# EAGLE board hersteld (EAGLE 6.5.0), part 1 of 2
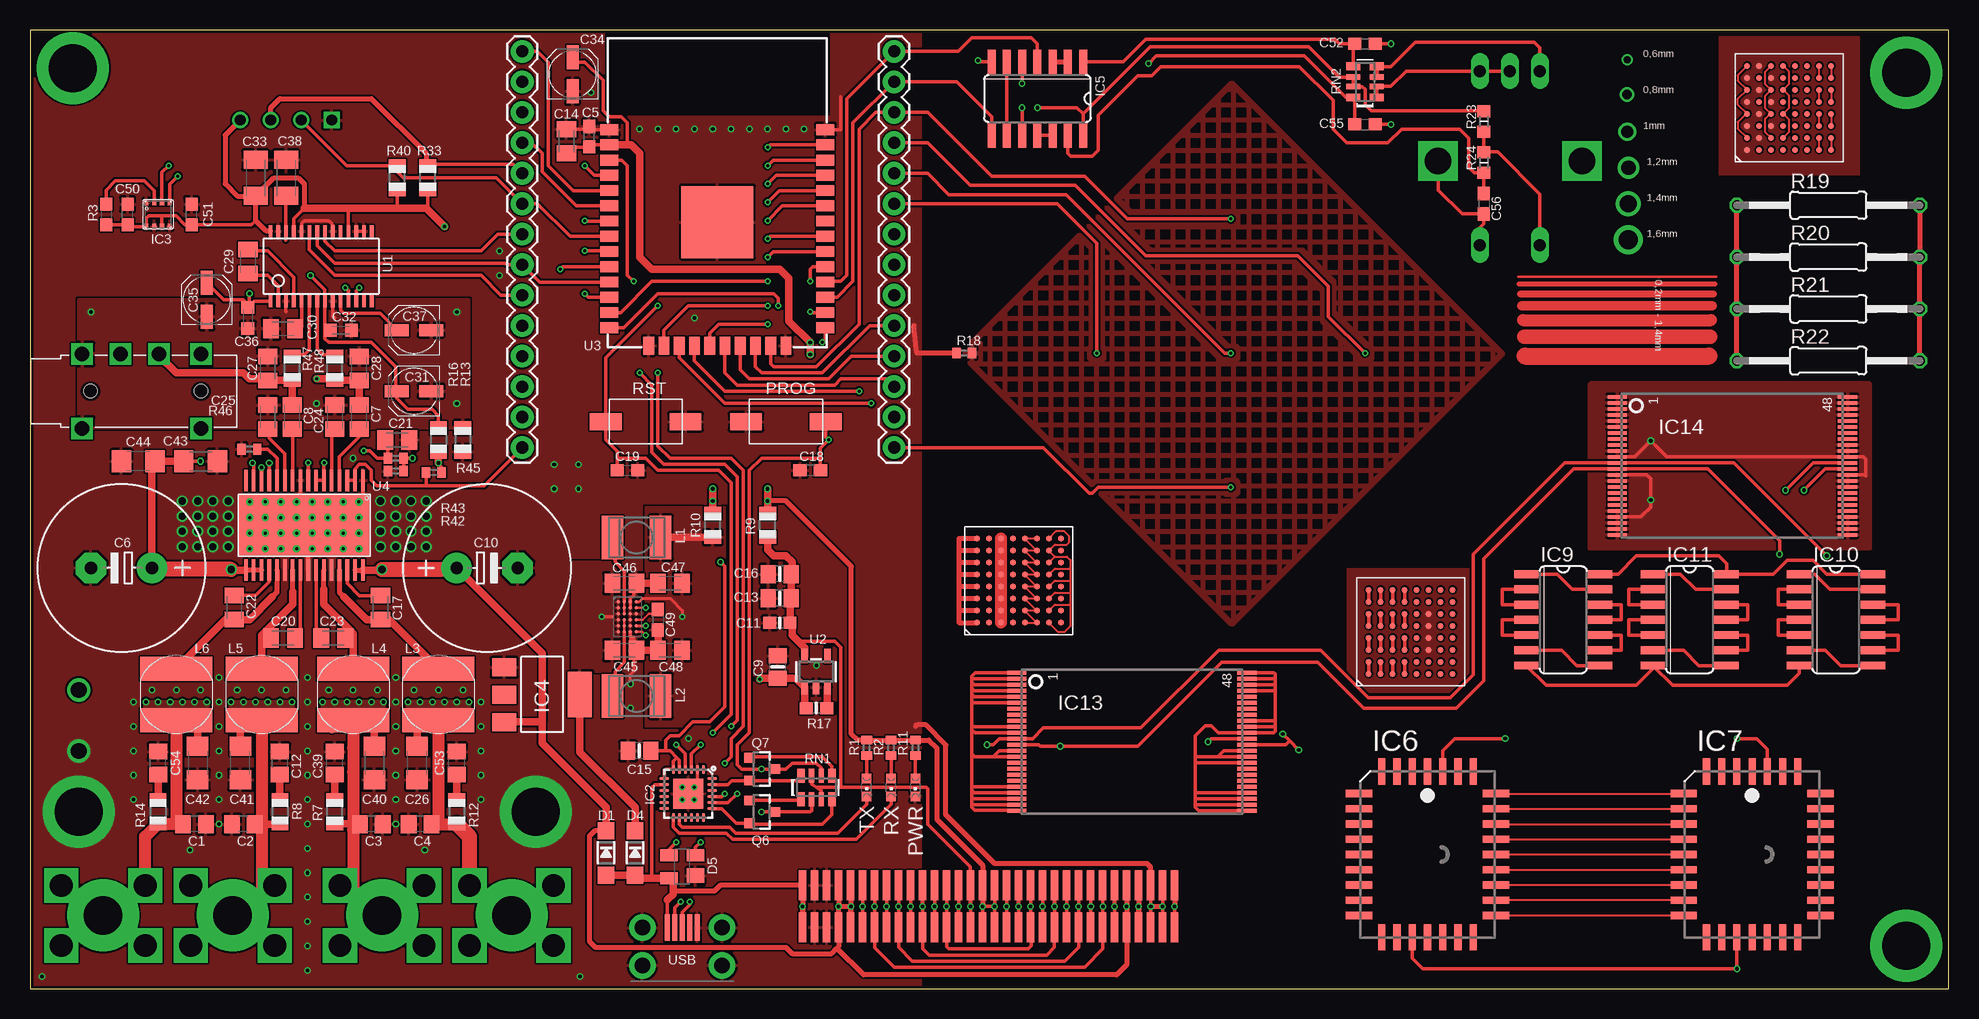
[diagram p0: board, top side]
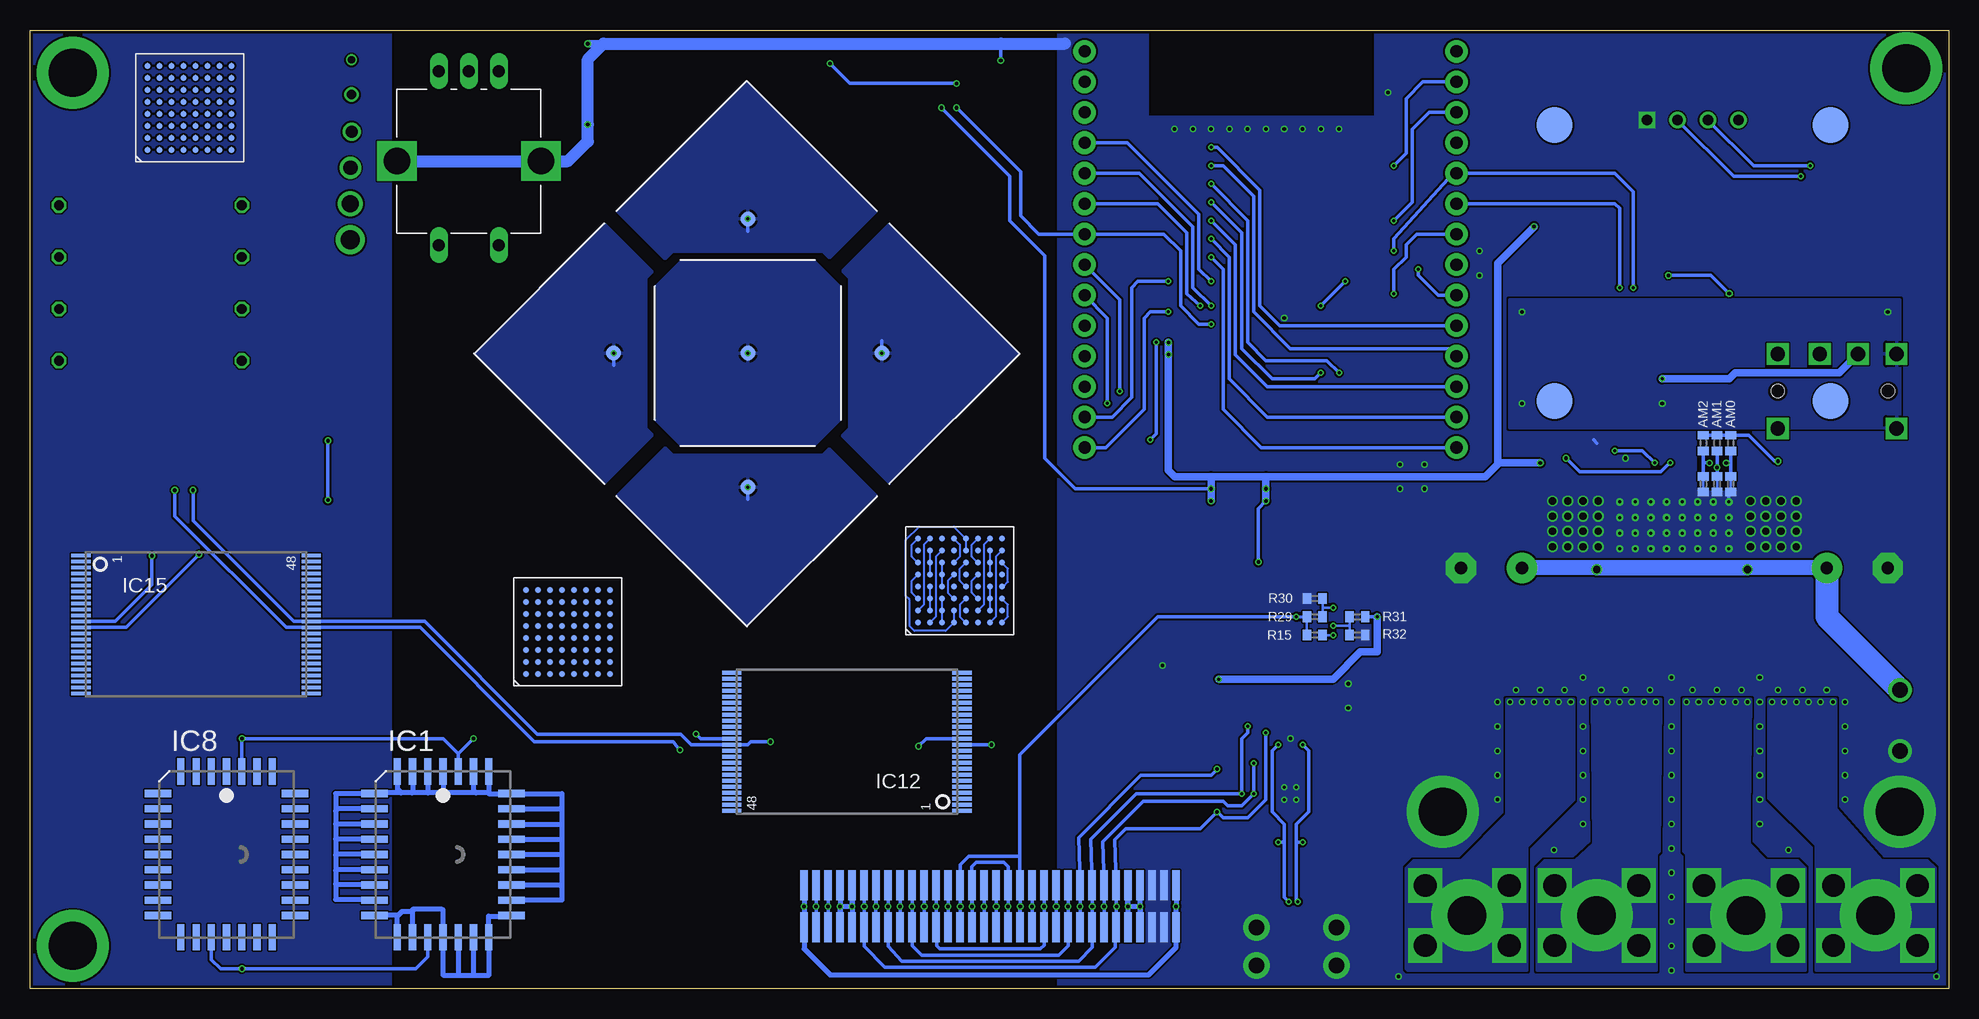
[diagram p1: board, bottom side, seen from below]

Size 159.89 x 79.88 mm. Coordinates in mm from the lower left corner, seen from the top.
Outline: 159.89,0 159.89,79.88 0,79.88 0,0 159.89,0
Copper layers (1*16): Top 0.018mm / dielectric 1.55mm / Bottom 0.018mm
Design rules "eC_2Layer_PClass6_BaseCopperO18_eCDefault *": minimum track width 0.15mm, minimum drill 0.25mm, track to track 0.15mm, track to pad 0.15mm, pad to pad 0.15mm, via to via 0.15mm, smd to smd 0mil, copper to edge 0.25mm, drill to drill 0.35mm, minimum pad ring 0.175mm, minimum via ring 0.125mm, stop-mask expansion 0mil, vias tented up to drill 0.45mm, thermal gap 0.2mm
Net classes: 0 default: width 0.152 mm, drill 0.25 mm, clearance 0.152 mm; 1 gnd: width 0.254 mm, drill 0.3 mm, clearance 0.152 mm; 2 vcc: width 0.254 mm, drill 0.3 mm, clearance 0.152 mm

## Footprints (pad centres in the part's own frame; a part is rotated, then mirrored left to right if it is on the bottom)
R0402 = smd 0.7 x 0.9: 1 -0.65,0; 2 0.65,0
C0805 = smd 1.3 x 1.5: 1 -0.95,0; 2 0.95,0
C0603 = smd 1.1 x 1: 1 -0.85,0; 2 0.85,0
E5-13 = drill 1.016 pad 2.54: + -2.54,0 | drill 1.016 pad 2.54 octagon: - 2.54,0
C0805K = smd 1.3 x 1.6: 1 -1,0; 2 1,0
0805-NO = smd 1.24 x 1.5: 1 -0.95,0; 2 0.95,0
0603-NO = smd 1.075 x 1: 1 -0.85,0; 2 0.85,0
C1206 = smd 1.6 x 1.8: 1 -1.4,0; 2 1.4,0
UD-4X5,8_NICHICON = smd 2 x 1: + 1.425,0; - -1.425,0
C0603K = smd 1.05 x 1.08: 1 -0.875,0; 2 0.875,0
C1206K = smd 1.5 x 2: 1 -1.5,0; 2 1.5,0
0603 = smd 1.1 x 1: 1 -0.85,0; 2 0.85,0
SOD-123 = smd 1.4 x 1.4: A 1.85,0; C -1.85,0
SOT143 = smd 1.2 x 1.44: 1 -0.75,-1.1 | smd 1 x 1.44: 2 0.95,-1.1; 3 0.95,1.1; 4 -0.95,1.1
PLCC32R = smd 0.6 x 2.2: 1 0,6.9; 2 -1.27,6.9; 3 -2.54,6.9; 4 -3.81,6.9; 14 -3.81,-6.9; 15 -2.54,-6.9; 16 -1.27,-6.9; 17 0,-6.9; 18 1.27,-6.9; 19 2.54,-6.9; 20 3.81,-6.9; 30 3.81,6.9; 31 2.54,6.9; 32 1.27,6.9 | smd 2.2 x 0.6: 5 -5.7,5.08; 6 -5.7,3.81; 7 -5.7,2.54; 8 -5.7,1.27; 9 -5.7,0; 10 -5.7,-1.27; 11 -5.7,-2.54; 12 -5.7,-3.81; 13 -5.7,-5.08; 21 5.7,-5.08; 22 5.7,-3.81; 23 5.7,-2.54; 24 5.7,-1.27; 25 5.7,0; 26 5.7,1.27; 27 5.7,2.54; 28 5.7,3.81; 29 5.7,5.08
QFN24_4MM_SMSC = smd 0.8 x 0.28: 1 -2,1.25; 2 -2,0.75; 3 -2,0.25; 4 -2,-0.25; 5 -2,-0.75; 6 -2,-1.25; 13 2,-1.25; 14 2,-0.75; 15 2,-0.25; 16 2,0.25; 17 2,0.75; 18 2,1.25 | smd 0.28 x 0.8: 7 -1.25,-2; 8 -0.75,-2; 9 -0.25,-2; 10 0.25,-2; 11 0.75,-2; 12 1.25,-2; 19 1.25,2; 20 0.75,2; 21 0.25,2; 22 -0.25,2; 23 -0.75,2; 24 -1.25,2 | smd 2.5 x 2.5: THERM 0,0
BME280 = smd 0.35 x 0.5: 1 0.975,-1.025; 2 0.325,-1.025; 3 -0.325,-1.025; 4 -0.975,-1.025; 5 -0.975,1.025; 6 -0.325,1.025; 7 0.325,1.025; 8 0.975,1.025
SOT223 = smd 1.499 x 2.007: 1 -2.261,-3.15; 2 0.025,-3.15; 3 2.311,-3.15 | smd 3.81 x 2.007: 4 0,3.15
SO14 = smd 0.66 x 2.032: 1 -3.81,-3.073; 2 -2.54,-3.073; 3 -1.27,-3.073; 4 0,-3.073; 5 1.27,-3.073; 6 2.54,-3.073; 7 3.81,-3.073; 8 3.81,3.073; 9 2.54,3.073; 10 1.27,3.073; 11 0,3.073; 12 -1.27,3.073; 13 -2.54,3.073; 14 -3.81,3.073
TSOP48 = smd 1.6 x 0.3: 1 -9.6,5.75; 2 -9.6,5.25; 3 -9.6,4.75; 4 -9.6,4.25; 5 -9.6,3.75; 6 -9.6,3.25; 7 -9.6,2.75; 8 -9.6,2.25; 9 -9.6,1.75; 10 -9.6,1.25; 11 -9.6,0.75; 12 -9.6,0.25; 13 -9.6,-0.25; 14 -9.6,-0.75; 15 -9.6,-1.25; 16 -9.6,-1.75; 17 -9.6,-2.25; 18 -9.6,-2.75; 19 -9.6,-3.25; 20 -9.6,-3.75; 21 -9.6,-4.25; 22 -9.6,-4.75; 23 -9.6,-5.25; 24 -9.6,-5.75; 25 9.6,-5.75; 26 9.6,-5.25; 27 9.6,-4.75; 28 9.6,-4.25; 29 9.6,-3.75; 30 9.6,-3.25; 31 9.6,-2.75; 32 9.6,-2.25; 33 9.6,-1.75; 34 9.6,-1.25; 35 9.6,-0.75; 36 9.6,-0.25; 37 9.6,0.25; 38 9.6,0.75; 39 9.6,1.25; 40 9.6,1.75; 41 9.6,2.25; 42 9.6,2.75; 43 9.6,3.25; 44 9.6,3.75; 45 9.6,4.25; 46 9.6,4.75; 47 9.6,5.25; 48 9.6,5.75
1X14 = drill 1.016 pad 1.88: 1 0,0; 2 2.54,0; 3 5.08,0; 4 7.62,0; 5 10.16,0; 6 12.7,0; 7 15.24,0; 8 17.78,0; 9 20.32,0; 10 22.86,0; 11 25.4,0; 12 27.94,0; 13 30.48,0; 14 33.02,0
L4532P = smd 1.8 x 3.6: 1 -2,0; 2 2,0
SRN6045 = smd 2 x 6: 1 -2.15,0; 2 2.15,0
CHIPLED_0603 = smd 0.8 x 0.8: A 0,-0.75; C 0,0.75
SOT23-3 = smd 0.8 x 0.9: 1 -0.95,-1; 2 0.95,-1; 3 0,1.1
R0805 = smd 1.1 x 1.4: 1 -1,0; 2 1,0
0207/15 = drill 0.813 octagon: 1 -7.62,0; 2 7.62,0
R0603 = smd 1 x 1.1: 1 -0.85,0; 2 0.85,0
RN8P-4R-CRA06S = smd 0.63 x 1.15: 1 -1.295,-0.975; 4 1.295,-0.975; 5 1.295,0.975; 8 -1.295,0.975 | smd 0.44 x 1.15: 2 -0.4,-0.975; 3 0.4,-0.975; 6 0.4,0.975; 7 -0.4,0.975
SW2-4.0-6.0X3.0X2.5MM = smd 2.65 x 1.4: 1 -3.325,0; 2 3.325,0
B1,27 = smd 1.27 x 1.27: TP 0,0
TSSOP-28 = smd 0.305 x 0.991: 1 -4.225,-2.918; 2 -3.575,-2.918; 3 -2.925,-2.918; 4 -2.275,-2.918; 5 -1.625,-2.918; 6 -0.975,-2.918; 7 -0.325,-2.918; 8 0.325,-2.918; 9 0.975,-2.918; 10 1.625,-2.918; 11 2.275,-2.918; 12 2.925,-2.918; 13 3.575,-2.918; 14 4.225,-2.918; 15 4.225,2.918; 16 3.575,2.918; 17 2.925,2.918; 18 2.275,2.918; 19 1.625,2.918; 20 0.975,2.918; 21 0.325,2.918; 22 -0.325,2.918; 23 -0.975,2.918; 24 -1.625,2.918; 25 -2.275,2.918; 26 -2.925,2.918; 27 -3.575,2.918; 28 -4.225,2.918
SOT23-5 = smd 0.55 x 1.2: 1 -0.95,-1.3; 2 0,-1.3; 3 0.95,-1.3; 4 0.95,1.3; 5 -0.95,1.3
ESP-WROOM-32 = smd 0.9 x 1.5: 1 7.7,9; 2 6.43,9; 3 5.16,9; 4 3.89,9; 5 2.62,9; 6 1.35,9; 7 0.08,9; 8 -1.19,9; 9 -2.46,9; 10 -3.73,9; 11 -5,9; 12 -6.27,9; 13 -7.54,9; 14 -8.81,9; 25 -8.81,-9; 26 -7.54,-9; 27 -6.27,-9; 28 -5,-9; 29 -3.73,-9; 30 -2.46,-9; 31 -1.19,-9; 32 0.08,-9; 33 1.35,-9; 34 2.62,-9; 35 3.89,-9; 36 5.16,-9; 37 6.43,-9; 38 7.7,-9 | smd 1.5 x 0.9: 15 -10.3,5.715; 16 -10.3,4.445; 17 -10.3,3.175; 18 -10.3,1.905; 19 -10.3,0.635; 20 -10.3,-0.635; 21 -10.3,-1.905; 22 -10.3,-3.175; 23 -10.3,-4.445; 24 -10.3,-5.715 | smd 6 x 6: GND 0,0
TSSOP32-GROUNDPAD = smd 1.8 x 0.3: AM0 -3.737,-4.225; AM1 -3.737,-3.575; AM2 -3.737,-2.925; AVCC 3.737,-4.875; BSNL 3.737,-2.925; BSNR 3.737,0.975; BSPL 3.737,-0.325; BSPR 3.737,3.575; FAULTZ -3.737,3.575; GAIN/SLV -3.737,0.325; GND1 -3.737,-0.325; GND2 3.737,-1.625; GND3 3.737,0.325; GND4 3.737,2.275; GVDD -3.737,0.975; INNL -3.737,-1.625; INNR -3.737,2.275; INPL -3.737,-0.975; INPR -3.737,2.925; MODSEL -3.737,4.875; MUTE -3.737,-2.275; OUTNL 3.737,-2.275; OUTNR 3.737,1.625; OUTPL 3.737,-0.975; OUTPR 3.737,2.925; PLIMIT -3.737,1.625; PVCC1 3.737,-4.225; PVCC2 3.737,-3.575; PVCC3 3.737,4.225; PVCC4 3.737,4.875; SDZ -3.737,4.225; SYNC -3.737,-4.875 | drill 0.25: P$33 0.65,4.55; P$34 -0.65,4.55; P$35 -1.95,4.55; P$36 1.95,4.55; P$37 -1.95,3.25; P$38 -1.95,1.95; P$39 -1.95,0.65; P$40 -1.95,-0.65; P$41 -1.95,-1.95; P$42 -1.95,-3.25; P$43 -1.95,-4.55; P$44 -0.65,3.25; P$45 0.65,3.25; P$46 1.95,3.25; P$47 -0.65,1.95; P$48 0.65,1.95; P$49 1.95,1.95; P$50 1.95,0.65; P$51 0.65,0.65; P$52 -0.65,0.65; P$53 -0.65,-0.65; P$54 0.65,-0.65; P$55 1.95,-0.65; P$56 1.95,-1.95; P$57 1.95,-3.25; P$58 1.95,-4.55; P$59 0.65,-4.55; P$60 0.65,-3.25; P$61 0.65,-1.95; P$62 -0.65,-1.95; P$63 -0.65,-3.25; P$64 -0.65,-4.55 | smd 5 x 11: POWERPAD 0,0.005
0714360864 = smd 0.635 x 2.5: P$1 -15.5,-1.75; P$2 -14.5,-1.75; P$3 -13.5,-1.75; P$4 -12.5,-1.75; P$5 -11.5,-1.75; P$6 -10.5,-1.75; P$7 -9.5,-1.75; P$8 -8.5,-1.75; P$9 -7.5,-1.75; P$10 -6.5,-1.75; P$11 -5.5,-1.75; P$12 -4.5,-1.75; P$13 -3.5,-1.75; P$14 -2.5,-1.75; P$15 -1.5,-1.75; P$16 -0.5,-1.75; P$17 0.5,-1.75; P$18 1.5,-1.75; P$19 2.5,-1.75; P$20 3.5,-1.75; P$21 4.5,-1.75; P$22 5.5,-1.75; P$23 6.5,-1.75; P$24 7.5,-1.75; P$25 8.5,-1.75; P$26 9.5,-1.75; P$27 10.5,-1.75; P$28 11.5,-1.75; P$29 12.5,-1.75; P$30 13.5,-1.75; P$31 14.5,-1.75; P$32 15.5,-1.75; P$33 15.5,1.75; P$34 14.5,1.75; P$35 13.5,1.75; P$36 12.5,1.75; P$37 11.5,1.75; P$38 10.5,1.75; P$39 9.5,1.75; P$40 8.5,1.75; P$41 7.5,1.75; P$42 6.5,1.75; P$43 5.5,1.75; P$44 4.5,1.75; P$45 3.5,1.75; P$46 2.5,1.75; P$47 1.5,1.75; P$48 0.5,1.75; P$49 -0.5,1.75; P$50 -1.5,1.75; P$51 -2.5,1.75; P$52 -3.5,1.75; P$53 -4.5,1.75; P$54 -5.5,1.75; P$55 -6.5,1.75; P$56 -7.5,1.75; P$57 -8.5,1.75; P$58 -9.5,1.75; P$59 -10.5,1.75; P$60 -11.5,1.75; P$61 -12.5,1.75; P$62 -13.5,1.75; P$63 -14.5,1.75; P$64 -15.5,1.75
DISPLAY = drill 0.9 square: P$1 -3.81,11.93 | drill 0.9: P$2 -1.27,11.93; P$3 1.27,11.93; P$4 3.81,11.93 | smd 3 x 3: P$5 -11.5,11.5; P$6 11.5,11.5; P$7 -11.5,-11.5; P$8 11.5,-11.5
BGA64 = smd 0.5 x 0.5: P$1 -3.5,3.5; P$2 -3.5,2.5; P$3 -3.5,1.5; P$4 -3.5,0.5; P$5 -3.5,-0.5; P$6 -3.5,-1.5; P$7 -3.5,-2.5; P$8 -3.5,-3.5; P$9 -2.5,3.5; P$10 -2.5,2.5; P$11 -2.5,1.5; P$12 -2.5,0.5; P$13 -2.5,-0.5; P$14 -2.5,-1.5; P$15 -2.5,-2.5; P$16 -2.5,-3.5; P$17 -1.5,3.5; P$18 -1.5,2.5; P$19 -1.5,1.5; P$20 -1.5,0.5; P$21 -1.5,-0.5; P$22 -1.5,-1.5; P$23 -1.5,-2.5; P$24 -1.5,-3.5; P$25 -0.5,3.5; P$26 -0.5,2.5; P$27 -0.5,1.5; P$28 -0.5,0.5; P$29 -0.5,-0.5; P$30 -0.5,-1.5; P$31 -0.5,-2.5; P$32 -0.5,-3.5; P$33 0.5,3.5; P$34 0.5,2.5; P$35 0.5,1.5; P$36 0.5,0.5; P$37 0.5,-0.5; P$38 0.5,-1.5; P$39 0.5,-2.5; P$40 0.5,-3.5; P$41 1.5,3.5; P$42 1.5,2.5; P$43 1.5,1.5; P$44 1.5,0.5; P$45 1.5,-0.5; P$46 1.5,-1.5; P$47 1.5,-2.5; P$48 1.5,-3.5; P$49 2.5,3.5; P$50 2.5,2.5; P$51 2.5,1.5; P$52 2.5,0.5; P$53 2.5,-0.5; P$54 2.5,-1.5; P$55 2.5,-2.5; P$56 2.5,-3.5; P$57 3.5,3.5; P$58 3.5,2.5; P$59 3.5,1.5; P$60 3.5,0.5; P$61 3.5,-0.5; P$62 3.5,-1.5; P$63 3.5,-2.5; P$64 3.5,-3.5
SCREWCON = drill 1.9 square: P$1 -2.5,3.5; P$2 2.5,3.5; P$3 -2.5,-3.5; P$4 2.5,-3.5
DSBGA24 = smd 0.3 x 0.3: A1 1.249,0.751; A2 1.249,0.251; A3 1.249,-0.249; A4 1.249,-0.749; B1 0.749,0.751; B2 0.749,0.251; B3 0.749,-0.249; B4 0.749,-0.749; C1 0.249,0.751; C2 0.249,0.251; C3 0.249,-0.249; C4 0.249,-0.749; D1 -0.251,0.751; D2 -0.251,0.251; D3 -0.251,-0.249; D4 -0.251,-0.749; E1 -0.751,0.751; E2 -0.751,0.251; E3 -0.751,-0.249; E4 -0.751,-0.749; F1 -1.251,0.751; F2 -1.251,0.251; F3 -1.251,-0.249; F4 -1.251,-0.749
JACK = drill 1.2 square: P$1 -4.8,3.1; P$2 -1.6,3.1; P$3 1.6,3.1; P$4 5.1,3.1; P$5 5.1,-3.1; P$6 -4.8,-3.1 | hole 1.1: 5.1,0; -4.1,0
ENCODER = drill 1 long: A 2.5,-7.5; B1 0,-7.5; B2 -2.5,-7.5; COM -2.5,7; SW 2.5,7 | drill 2.2 square: P$6 -6,0; P$7 6,0
MICRO-B-SMT = smd 0.4 x 2.2: 1 1.24,0; 2 0.62,0; 3 0,0; 4 -0.62,0; 5 -1.24,0 | drill 1.3 pad 2.2: P$6 -3.325,3.15; P$7 -3.325,0; P$8 3.325,3.15; P$9 3.325,0

## Placement (x,y rotation side)
AM0  0  [R0402]  18.16,42.04 90 bottom
AM1  0  [R0402]  19.3,42.04 90 bottom
AM2  0  [R0402]  20.45,42.04 90 bottom
C1  1n  [C0805]  13.72,13.72 180 top
C2  1n  [C0805]  17.78,13.72 180 top
C3  1n  [C0805]  28.45,13.72 180 top
C4  1n  [C0805]  32.51,13.72 180 top
C5  100n  [C0603]  46.61,70.99 90 top
C6  [E5-13]  7.62,35.05 180 top
C7  1u  [C0805K]  27.43,47.62 270 top
C8  1u  [C0805K]  21.84,47.62 270 top
C9  10µF  [0805-NO]  62.32,26.8 90 top
C10  [E5-13]  38.1,35.05 0 top
C11  1uF  [0603-NO]  62.48,30.47 180 top
C12  10n  [C0805]  20.83,18.8 90 top
C13  10µF  [0805-NO]  62.47,32.52 180 top
C14  10u  [C0805K]  44.7,70.61 90 top
C15  10uF  [0805-NO]  50.79,19.81 180 top
C16  10uF  [0805-NO]  62.48,34.54 180 top
C17  220n  [C0805K]  29.21,31.75 270 top
C18  1n  [C0603]  65.02,43.18 180 top
C19  1n  [C0603]  49.78,43.18 0 top
C20  220n  [C0805K]  21.08,29.21 180 top
C21  1u  [C0805K]  30.61,45.72 0 top
C22  220n  [C0805K]  17.02,31.75 270 top
C23  220n  [C0805K]  25.27,29.21 0 top
C24  1u  [C0805K]  25.4,47.62 270 top
C25  1u  [C0805K]  19.81,47.62 270 top
C26  1u  [C1206]  32.26,18.8 90 top
C27  2n2  [C0805K]  19.81,51.69 90 top
C28  2n2  [C0805K]  27.43,51.69 90 top
C29  2u2  [C0805K]  18.16,60.58 90 top
C30  2u2  [C0805K]  21.08,54.99 180 top
C31  10u  [UD-4X5,8_NICHICON]  32,49.78 180 top
C32  100n  [C0603K]  25.91,54.86 180 top
C33  2u2  [C1206K]  18.8,67.56 270 top
C34  10u  [UD-4X5,8_NICHICON]  45.21,76.2 90 top
C35  10u  [UD-4X5,8_NICHICON]  14.73,57.4 90 top
C36  100n  [C0603K]  18.16,55.88 90 top
C37  10u  [UD-4X5,8_NICHICON]  32,54.86 180 top
C38  2u2  [C1206K]  21.34,67.56 90 top
C39  10n  [C0805]  25.4,18.8 90 top
C40  1u  [C1206]  28.7,18.8 270 top
C41  1u  [C1206]  17.53,18.8 90 top
C42  1u  [C1206]  13.97,18.8 270 top
C43  1u  [C1206]  14.22,43.94 0 top
C44  1u  [C1206]  9.02,43.94 180 top
C45  22u  [C0805K]  49.53,28.19 0 top
C46  22u  [C0805K]  49.53,33.78 0 top
C47  47u  [C0805K]  53.34,33.78 180 top
C48  47u  [C0805K]  53.34,28.19 180 top
C49  3n3  [C0603]  52.32,30.73 270 top
C50  0.1uF  [0603]  8.13,64.52 90 top
C51  0.1uF  [0603]  13.46,64.52 90 top
C52  10n  [C0603]  111.25,78.74 0 top
C53  10n  [C0805]  35.56,18.8 90 top
C54  10n  [C0805]  10.67,18.8 90 top
C55  10n  [C0603]  111.25,72.01 0 top
C56  10n  [C0603]  121.16,65.41 270 top
D1  MBR120  [SOD-123]  48.01,11.3 270 top
D4  MBR120  [SOD-123]  50.42,11.3 270 top
D5  SP0503  [SOT143]  54.36,10.16 90 top
IC1  AM29F040J  [PLCC32R]  125.48,11.18 0 bottom
IC2  CP2104  [QFN24_4MM_SMSC]  54.86,16.26 270 top
IC3  BME280  [BME280]  10.67,64.52 180 top
IC4  REG1117  [SOT223]  42.67,24.51 270 top
IC5  4584D  [SO14]  83.95,74.17 180 top
IC6  AM29F040J  [PLCC32R]  116.46,11.18 0 top
IC7  AM29F040J  [PLCC32R]  143.51,11.18 0 top
IC8  AM29F040J  [PLCC32R]  143.51,11.18 0 bottom
IC9  4584D  [SO14]  127.76,30.73 270 top
IC10  4584D  [SO14]  150.5,30.73 270 top
IC11  4584D  [SO14]  138.3,30.73 270 top
IC12  K9F5608  [TSOP48]  91.82,20.57 180 bottom
IC13  K9F5608  [TSOP48]  91.82,20.57 0 top
IC14  K9F5608  [TSOP48]  141.86,43.56 0 top
IC15  K9F5608  [TSOP48]  146.05,30.35 0 bottom
JP1  [1X14]  41.02,45.09 90 top
JP2  [1X14]  72.01,45.09 90 top
L1  [L4532P]  50.55,37.59 0 top
L2  [L4532P]  50.55,24.38 0 top
L3  [SRN6045]  34.04,24.51 270 top
L4  [SRN6045]  26.92,24.51 270 top
L5  [SRN6045]  19.3,24.51 270 top
L6  [SRN6045]  12.19,24.51 270 top
PWR  [CHIPLED_0603]  73.79,16.76 180 top
Q6  mmbt2222  [SOT23-3]  60.96,14.73 270 top
Q7  mmbt2222  [SOT23-3]  60.96,18.29 270 top
R1  [R0402]  69.72,20.07 90 top
R2  [R0402]  71.75,20.07 90 top
R3  4.7k  [0603]  6.35,64.52 270 top
R4  0  [R0402]  18.16,45.47 270 bottom
R5  0  [R0402]  20.45,45.47 270 bottom
R6  0  [R0402]  19.3,45.47 270 bottom
R7  3R3  [R0805]  25.4,14.73 90 top
R8  3R3  [R0805]  20.83,14.73 270 top
R9  0  [R0805]  61.47,38.61 90 top
R10  0  [R0805]  56.9,38.61 90 top
R11  [R0402]  73.79,20.07 90 top
R12  3R3  [R0805]  35.56,14.73 270 top
R13  0  [R0805]  36.07,45.72 270 top
R14  3R3  [R0805]  10.67,14.73 270 top
R15  470k  [R0402]  52.83,29.46 0 bottom
R16  0  [R0805]  34.04,45.72 270 top
R17  100K  [0603-NO]  65.53,23.38 180 top
R18  [R0402]  77.85,52.96 0 top
R19  [0207/15]  149.86,65.28 0 top
R20  [0207/15]  149.86,60.96 0 top
R21  [0207/15]  149.86,56.64 0 top
R22  [0207/15]  149.86,52.32 0 top
R23  [R0603]  121.16,72.26 90 top
R24  [R0603]  121.16,68.83 90 top
R29  470k  [R0402]  52.83,30.99 0 bottom
R30  150k  [R0402]  52.83,32.51 180 bottom
R31  [R0402]  49.28,30.98 180 bottom
R32  [R0402]  49.28,29.46 0 bottom
R33  4k7  [R0805]  33.15,67.56 90 top
R40  4k7  [R0805]  30.61,67.56 90 top
R42  5k6  [R0402]  30.48,43.13 0 top
R43  open  [R0402]  30.48,44.2 0 top
R45  100k  [R0402]  33.66,43.01 180 top
R46  100k  [R0402]  18.29,44.96 0 top
R47  470  [R0805]  21.84,51.69 90 top
R48  470  [R0805]  25.4,51.69 90 top
RN1  10k  [RN8P-4R-CRA06S]  65.53,16.76 0 top
RN2  10k  [RN8P-4R-CRA06S]  111.25,75.56 90 top
RX  [CHIPLED_0603]  71.75,16.76 180 top
SW1  PROG  [SW2-4.0-6.0X3.0X2.5MM]  62.99,47.24 0 top
SW2  RST  [SW2-4.0-6.0X3.0X2.5MM]  51.31,47.24 180 top
TP1  PTR1B1,27  [B1,27]  100.08,41.78 0 bottom
TP2  PTR1B1,27  [B1,27]  88.9,52.96 0 bottom
TP3  PTR1B1,27  [B1,27]  111.25,52.96 0 bottom
TP4  PTR1B1,27  [B1,27]  100.08,52.96 0 bottom
TP5  PTR1B1,27  [B1,27]  100.08,64.14 0 bottom
TX  [CHIPLED_0603]  69.72,16.76 180 top
U1  PCM5122  [TSSOP-28]  24.26,60.2 0 top
U2  AP2112-3.3  [SOT23-5]  65.51,26.42 0 top
U3  ESP-WROOM-32  [ESP-WROOM-32]  57.28,63.88 90 top
U4  TPA3130  [TSSOP32-GROUNDPAD]  22.86,38.61 270 top
U$1  0714360864  [0714360864]  79.88,6.86 0 top
U$2  DISPLAY  [DISPLAY]  21.34,60.45 0 bottom
U$5  BGA64  [BGA64]  146.6,73.4 0 top
U$9  SCREWCON  [SCREWCON]  40.13,6.1 270 top
U$13  0714360864  [0714360864]  79.88,6.86 180 bottom
U$14  TPS62182  [DSBGA24]  49.78,30.99 90 top
U$15  JACK  [JACK]  9.14,49.78 0 top
U$16  SCREWCON  [SCREWCON]  29.34,6.1 90 top
U$21  BGA64  [BGA64]  146.6,73.4 0 bottom
U$22  SCREWCON  [SCREWCON]  16.89,6.1 90 top
U$23  SCREWCON  [SCREWCON]  6.1,6.1 90 top
U$24  BGA64  [BGA64]  82.4,34 0 top
U$32  BGA64  [BGA64]  82.4,34 0 bottom
U$41  ROTARY  [ENCODER]  123.32,68.96 180 bottom
U$42  BGA64  [BGA64]  115.06,29.72 0 top
U$43  BGA64  [BGA64]  115.06,29.72 0 bottom
USB  JRUSB  [MICRO-B-SMT]  54.36,5.08 180 top

## Library data of the parts
AM0 AM1 AM2 PWR R4-R10 R12-R14 R16 R33 R40 R42 R43 R45-R48 RX TX = adafruit
C1-C5 C7 C8 C12 C14 C17-C49 C52-C56 L1 L2 R1 R2 R11 R15 R18-R24 R29-R32 = rcl
C6 C10 = resistor
C9 C11 C15 C16 D1 D4 IC2 R17 U2 = microbuilder
C13 = microbuilder; COMPANY: ADAFRUIT INDUSTRIES; DRAWN: KTOWN; REV: A
C50 C51 = SparkFun-Capacitors; PROD_ID: CAP-00810
D5 U1 U4 U$1 U$2 U$5 U$9 U$13 U$15 U$16 U$21-U$24 U$32 U$41-U$43 = jacob
IC1 IC6-IC8 = am29-memory
IC3 = bosch-bme280
IC4 = burr-brown; MPN: REG1117; OC_FARNELL: 1097566; OC_NEWARK: 14P6981
IC5 IC9-IC11 = 45xx
IC12-IC15 = flashmemory
JP1 JP2 USB = SparkFun-Connectors
L3-L6 = bourns
Q6 Q7 = SparkFun
R3 = SparkFun-Resistors; PROD_ID: RES-07857
RN1 RN2 = dp_devices
SW1 SW2 = Seeed-OPL-Switch
TP1-TP5 = testpad
U3 = esp32
U$14 = TPS6218x

## Nets
3.3V: C11.1 C13.1 C16.1 R9.1 RN1.3 RN1.7 U2.5 U$1.P$15 U$1.P$18 U$1.P$47 U$1.P$50 U$13.P$15 U$13.P$18 U$13.P$47 U$13.P$50
3V3 [vcc]: C5.1 C14.1 C15.1 C33.2 C34.+ C50.1 C51.1 IC2.5 IC2.6 IC2.7 IC3.6 IC3.8 IC5.14 R1.2 R2.2 R3.2 R9.2 R10.2 R11.2 R16.2 R23.2 R33.1 R40.1 R45.1 RN2.6 RN2.7 U1.18 U1.25 U1.28 U3.2 U$1.P$16 U$1.P$17 U$1.P$48 U$1.P$49 U$2.P$4 U$13.P$16 U$13.P$17 U$13.P$48 U$13.P$49
+5V: C9.1 C45.1 C46.1 D4.C IC4.4 R17.2 R31.1 U2.1 U$14.A1 U$14.B1 U$14.C1 U$14.D1 U$14.E1 U$14.F1
A3V3 [vcc]: C31.+ C32.2 C35.+ C36.2 R16.1 U1.1 U1.8
AGND [gnd]: C24.1 C25.1 C27.2 C28.2 C30.2 C31.- C32.1 C35.- C36.1 C37.- R13.1 U1.3 U1.9 U$15.P$1 U$15.P$6
AP_EN: R17.1 U2.3
DTR: IC2.23 Q7.2 RN1.8
EN: C19.1 Q6.3 RN1.2 SW2.2 U3.3 U$1.P$6 U$1.P$27 U$1.P$38 U$1.P$59 U$13.P$6 U$13.P$27 U$13.P$38 U$13.P$59
GND [gnd]: AM0.1 AM1.1 AM2.1 C1.1 C2.2 C3.1 C4.2 C5.2 C6.- C9.2 C10.- C11.2 C12.2 C13.2 C14.2 C15.2 C16.2 C18.2 C19.2 C21.2 C26.1 C33.1 C34.- C38.2 C39.2 C40.2 C41.1 C42.2 C43.2 C44.2 C45.2 C46.2 C47.2 C48.2 C49.2 C50.2 C51.2 C52.2 C53.2 C54.2 C55.2 C56.2 D5.1 IC2.2 IC2.THERM IC3.1 IC3.5 IC3.7 IC4.1 IC5.7 PWR.C R13.2 R18.1 R30.2 R32.2 R42.1 R46.1 SW1.1 SW2.1 U1.16 U1.17 U1.20 U1.24 U1.27 U2.2 U3.1 U3.15 U3.24 U3.38 U3.GND U4.GND1 U4.GND2 U4.GND3 U4.GND4 U4.MODSEL U4.P$33 U4.P$34 U4.P$35 U4.P$36 U4.P$37 U4.P$38 U4.P$39 U4.P$40 U4.P$41 U4.P$42 U4.P$43 U4.P$44 U4.P$45 U4.P$46 U4.P$47 U4.P$48 U4.P$49 U4.P$50 U4.P$51 U4.P$52 U4.P$53 U4.P$54 U4.P$55 U4.P$56 U4.P$57 U4.P$58 U4.P$59 U4.P$60 U4.P$61 U4.P$62 U4.P$63 U4.P$64 U4.POWERPAD U$1.P$2 U$1.P$3 U$1.P$30 U$1.P$31 U$1.P$34 U$1.P$35 U$1.P$62 U$1.P$63 U$2.P$1 U$13.P$2 U$13.P$3 U$13.P$30 U$13.P$31 U$13.P$34 U$13.P$35 U$13.P$62 U$13.P$63 U$14.A3 U$14.B3 U$14.C3 U$14.C4 U$14.D3 U$14.E3 U$14.F3 U$41.COM U$41.P$6 U$41.P$7 USB.5 USB.P$6 USB.P$7 USB.P$8 USB.P$9
GND1: R18.2
IO0: C18.1 Q7.3 RN1.6 SW1.2 U3.25 U$1.P$9 U$1.P$24 U$1.P$41 U$1.P$56 U$13.P$9 U$13.P$24 U$13.P$41 U$13.P$56
IO4: JP2.1 TP1.TP U3.26
IO5: JP2.2 U3.29
IO6: JP2.3 U3.20
IO7: JP2.4 U3.21
IO8: JP2.5 U3.22
IO9: JP2.6 U3.17
IO10: JP2.7 U3.18
IO11: IC5.10 JP2.8 U3.19
IO12: JP2.9 TP2.TP U3.14
IO13: JP2.10 TP4.TP U3.16
IO14: JP2.11 TP3.TP U3.13
IO15: JP2.12 TP5.TP U3.23
IO16: IC5.8 JP2.13 U3.27
IO17: IC5.4 JP2.14 U3.28
IO18: JP1.1 R45.2 U3.30 U4.FAULTZ U4.SDZ
IO19: JP1.2 U3.31
IO21: JP1.3 U3.33
IO22: JP1.4 U3.36
IO23: JP1.5 U3.37
IO25: JP1.6 U1.23 U3.10
IO26: JP1.7 U1.22 U3.11
IO27: JP1.8 U1.21 U3.12
IO32: IC3.4 JP1.9 R40.2 U1.12 U3.8 U$2.P$2
IO33: IC3.3 JP1.10 R33.2 U1.11 U3.9 U$2.P$3
IO34: JP1.11 U3.6
IO35: JP1.12 U3.7
IO36: JP1.13 U3.4
IO39: JP1.14 U3.5
LEFT+: C2.1 C41.2 L5.2 R8.2 U$22.P$1 U$22.P$2 U$22.P$3 U$22.P$4
LEFT-: C1.2 C42.1 L6.2 R14.2 U$23.P$1 U$23.P$2 U$23.P$3 U$23.P$4
N$2: RN2.3 RN2.4 U$41.A
N$4: C54.1 R14.1
N$6: C53.1 R12.1
N$8: C12.1 R8.1
N$9: C8.1 C27.1 R47.1 U$15.P$3
N$10: C7.1 C28.1 R48.1 U$15.P$2
N$11: C39.1 R7.2
N$12: C7.2 U4.INPR
N$13: C8.2 U4.INPL
N$14: R48.2 U1.7
N$15: D5.3 IC2.4 USB.2
N$16: IC5.11 IC5.12
N$17: RN2.1 RN2.2 U$41.B1 U$41.B2
N$18: C52.1 IC5.1 RN2.5
N$21: D5.2 IC2.3 USB.3
N$22: C55.1 IC5.5 RN2.8
N$23: R23.1 R24.2 U$41.SW
N$24: Q7.1 RN1.5
N$28: Q6.1 RN1.1
N$29: IC1.16 IC6.16 IC7.16 IC8.16
N$30: IC1.32 IC6.32 IC7.32 IC8.32
N$31: PWR.A R11.1
N$32: IC2.14 TX.C
N$33: IC3.2 R3.1
N$34: IC2.13 RX.C
N$35: C49.1 U$14.D4
N$36: R1.1 TX.A
N$37: U$1.P$10 U$1.P$23 U$1.P$42 U$1.P$55 U$13.P$10 U$13.P$23 U$13.P$42 U$13.P$55
N$38: U$1.P$11 U$1.P$22 U$1.P$43 U$1.P$54 U$13.P$11 U$13.P$22 U$13.P$43 U$13.P$54
N$39: L1.1 U$14.A2 U$14.B2 U$14.C2
N$40: L2.1 U$14.D2 U$14.E2 U$14.F2
N$41: U$1.P$12 U$1.P$21 U$1.P$44 U$1.P$53 U$13.P$12 U$13.P$21 U$13.P$44 U$13.P$53
N$42: R15.2 U$14.F4
N$43: R29.2 R30.1 U$14.B4
N$44: R31.2 R32.1 U$14.E4
N$45: U$1.P$13 U$1.P$20 U$1.P$45 U$1.P$52 U$13.P$13 U$13.P$20 U$13.P$45 U$13.P$52
N$46: R2.1 RX.A
N$47: IC9.2 IC9.3
N$48: IC9.4 IC9.5
N$49: C24.2 U4.INNR
N$50: C25.2 U4.INNL
N$51: C21.1 R43.1 U4.GVDD U4.PLIMIT
N$52: C17.1 U4.BSPR
N$53: C17.2 L3.1 U4.OUTPR
N$54: C20.1 U4.BSPL
N$55: C20.2 L5.1 U4.OUTPL
N$56: C23.2 L4.1 U4.OUTNR
N$57: IC9.9 IC9.10
N$58: C23.1 U4.BSNR
N$59: C22.1 U4.BSNL
N$64: C22.2 L6.1 U4.OUTNL
N$65: R42.2 R43.2 U4.GAIN/SLV
N$66: IC9.6 IC9.8
N$67: R46.2 U4.MUTE
N$68: R47.2 U1.6
N$69: C29.2 U1.4
N$70: C29.1 U1.2
N$71: C30.1 U1.5
N$72: IC9.1 IC9.13
N$73: IC9.11 IC9.12
N$74: C37.+ U1.10
N$75: C38.1 U1.26
N$76: IC10.2 IC10.3
N$77: IC10.4 IC10.5
N$78: IC10.9 IC10.10
N$79: IC10.6 IC10.8
N$80: IC10.1 IC10.13
N$81: IC10.11 IC10.12
N$82: IC11.2 IC11.3
N$83: IC11.4 IC11.5
N$84: IC11.9 IC11.10
N$85: IC11.6 IC11.8
N$86: IC11.1 IC11.13
N$87: IC11.11 IC11.12
N$88: R19.1 R20.1 R21.1 R22.1
N$89: R19.2 R20.2 R21.2 R22.2
N$90: U$5.P$17 U$5.P$19 U$5.P$21 U$5.P$23
N$91: IC5.2 IC5.3
N$92: IC5.6 IC5.9
N$93: C56.1 IC5.13 R24.1
N$94: IC13.1 IC13.2 IC13.3 IC13.4 IC13.5 IC13.6 IC13.10 IC13.11 IC13.14 IC13.15 IC13.20 IC13.21 IC13.22 IC13.23 IC13.24
N$95: U$42.P$27 U$42.P$28
N$96: U$42.P$29 U$42.P$30
N$97: U$42.P$25 U$42.P$26
N$98: U$42.P$23 U$42.P$24
N$99: U$42.P$21 U$42.P$22
N$100: U$42.P$19 U$42.P$20
N$101: U$42.P$17 U$42.P$18
N$102: U$42.P$15 U$42.P$16
N$103: U$42.P$13 U$42.P$14
N$104: U$42.P$11 U$42.P$12
N$105: U$42.P$9 U$42.P$10
N$106: U$42.P$7 U$42.P$8
N$107: U$42.P$5 U$42.P$6
N$108: U$42.P$3 U$42.P$4
N$109: U$42.P$1 U$42.P$2
N$110: U$42.P$31 U$42.P$32
N$111: U$32.P$62 U$32.P$64
N$112: U$32.P$59 U$32.P$61
N$113: U$32.P$56 U$32.P$58
N$114: U$32.P$53 U$32.P$54 U$32.P$55
N$115: U$32.P$50 U$32.P$51 U$32.P$52
N$116: U$32.P$47 U$32.P$49
N$117: U$32.P$44 U$32.P$46
N$118: U$32.P$41 U$32.P$43
N$119: U$32.P$38 U$32.P$40
N$120: U$32.P$35 U$32.P$37
N$121: IC6.29 IC7.5
N$122: IC6.28 IC7.6
N$123: IC6.27 IC7.7
N$124: IC6.26 IC7.8
N$125: IC6.25 IC7.9
N$126: IC6.24 IC7.10
N$127: IC6.23 IC7.11
N$128: IC6.22 IC7.12
N$129: IC6.21 IC7.13
N$130: U$5.P$1 U$5.P$3 U$5.P$5 U$5.P$7
N$131: U$5.P$63 U$5.P$64
N$132: U$5.P$25 U$5.P$27 U$5.P$29 U$5.P$31
N$133: U$5.P$2 U$5.P$4 U$5.P$6 U$5.P$8 U$5.P$9 U$5.P$11 U$5.P$13 U$5.P$15 U$5.P$18 U$5.P$20 U$5.P$22
N$134: U$5.P$61 U$5.P$62
N$135: U$5.P$59 U$5.P$60
N$136: U$5.P$57 U$5.P$58
N$137: U$5.P$55 U$5.P$56
N$138: U$5.P$53 U$5.P$54
N$139: U$5.P$51 U$5.P$52
N$140: U$5.P$49 U$5.P$50
N$141: U$42.P$43 U$42.P$44 U$42.P$45 U$42.P$46
N$142: U$32.P$1 U$32.P$3
N$143: U$32.P$4 U$32.P$6
N$144: U$32.P$7 U$32.P$9
N$145: U$32.P$10 U$32.P$11 U$32.P$12
N$146: U$32.P$13 U$32.P$14 U$32.P$15
N$147: U$32.P$16 U$32.P$18
N$148: U$32.P$19 U$32.P$20 U$32.P$21
N$149: U$32.P$22 U$32.P$23 U$32.P$24
N$150: U$32.P$25 U$32.P$27
N$151: U$32.P$28 U$32.P$30
N$152: U$32.P$31 U$32.P$32 U$32.P$33 U$32.P$34
N$153: U$24.P$1 U$24.P$2 U$24.P$3 U$24.P$4 U$24.P$5 U$24.P$6 U$24.P$7 U$24.P$8
N$154: U$24.P$17 U$24.P$18 U$24.P$19 U$24.P$20 U$24.P$21 U$24.P$22 U$24.P$23 U$24.P$24
N$155: U$24.P$49 U$24.P$50 U$24.P$51 U$24.P$52 U$24.P$53 U$24.P$54 U$24.P$55 U$24.P$56
N$156: U$24.P$33 U$24.P$34 U$24.P$35 U$24.P$36 U$24.P$37 U$24.P$38 U$24.P$39 U$24.P$40 U$24.P$41 U$24.P$42 U$24.P$43 U$24.P$44 U$24.P$45 U$24.P$46 U$24.P$47 U$24.P$48
N$157: IC1.1 IC1.2 IC1.3 IC1.4 IC1.5 IC1.6 IC1.7 IC1.8 IC1.9 IC1.10 IC1.11 IC1.12 IC1.22 IC1.23 IC1.24 IC1.25 IC1.26 IC1.27 IC1.28 IC1.29 IC1.30 IC1.31
N$158: IC1.13 IC1.14 IC1.15 IC1.17 IC1.18 IC1.19 IC1.20 IC1.21
N$159: IC13.25 IC13.26 IC13.27 IC13.28 IC13.33 IC13.34 IC13.35 IC13.38 IC13.39 IC13.40 IC13.45 IC13.46 IC13.47 IC13.48
N$160: IC14.1 IC14.2 IC14.3 IC14.4 IC14.5 IC14.6 IC14.10 IC14.11 IC14.14 IC14.15 IC14.20 IC14.21 IC14.22 IC14.23 IC14.24 IC14.25 IC14.26 IC14.27 IC14.28 IC14.33 IC14.34 IC14.35 IC14.38 IC14.39 IC14.40 IC14.45 IC14.46 IC14.47 IC14.48
N$171 [gnd]: AM0.2 R4.2 U4.AM0
N$172 [gnd]: AM1.2 R6.2 U4.AM1
N$173 [gnd]: AM2.2 R5.2 U4.AM2
OUTDCDC: C47.1 C48.1 L1.2 L2.2 R10.1 R15.1 R29.1 U$1.P$14 U$1.P$19 U$1.P$46 U$1.P$51 U$13.P$14 U$13.P$19 U$13.P$46 U$13.P$51 U$14.A4
RIGHT+: C4.1 C26.2 L3.2 R12.2 U$9.P$1 U$9.P$2 U$9.P$3 U$9.P$4
RIGHT-: C3.2 C40.1 L4.2 R7.1 U$16.P$1 U$16.P$2 U$16.P$3 U$16.P$4
RTS: IC2.19 Q6.2 RN1.4
RXD0: IC2.21 U3.34 U$1.P$7 U$1.P$26 U$1.P$39 U$1.P$58 U$13.P$7 U$13.P$26 U$13.P$39 U$13.P$58
TXD0: IC2.20 U3.35 U$1.P$8 U$1.P$25 U$1.P$40 U$1.P$57 U$13.P$8 U$13.P$25 U$13.P$40 U$13.P$57
VBUS: D1.A D4.A D5.4 IC2.8 U$1.P$1 U$1.P$32 U$1.P$33 U$1.P$64 U$13.P$1 U$13.P$32 U$13.P$33 U$13.P$64 USB.1
VCC [vcc]: C6.+ C10.+ C43.1 C44.1 D1.C IC4.3 R4.1 R5.1 R6.1 U4.AVCC U4.PVCC1 U4.PVCC2 U4.PVCC3 U4.PVCC4 U$1.P$4 U$1.P$5 U$1.P$28 U$1.P$29 U$1.P$36 U$1.P$37 U$1.P$60 U$1.P$61 U$13.P$4 U$13.P$5 U$13.P$28 U$13.P$29 U$13.P$36 U$13.P$37 U$13.P$60 U$13.P$61
VDD: IC9.14 IC10.14 IC11.14
VDD1: IC12.12 IC13.12 IC14.12 IC15.12
VDD2: IC12.37 IC13.37 IC14.37 IC15.37
VSS: IC9.7 IC10.7 IC11.7
VSS1: IC12.13 IC13.13 IC14.13 IC15.13
VSS2: IC12.36 IC13.36 IC14.36 IC15.36